# Altium PCB UC-526.PcbDoc (part 2 of 3)
Units mil, origin at the board's own origin, x right, y up, seen from the top; angles counter-clockwise.
Board outline 3149.61 x 3149.61 mil, 2 copper layers (Top Layer, Bottom Layer); 464 components, 208 nets, 2160 pads, 392 vias.
Unrouted connection lines stored in the file: 5.
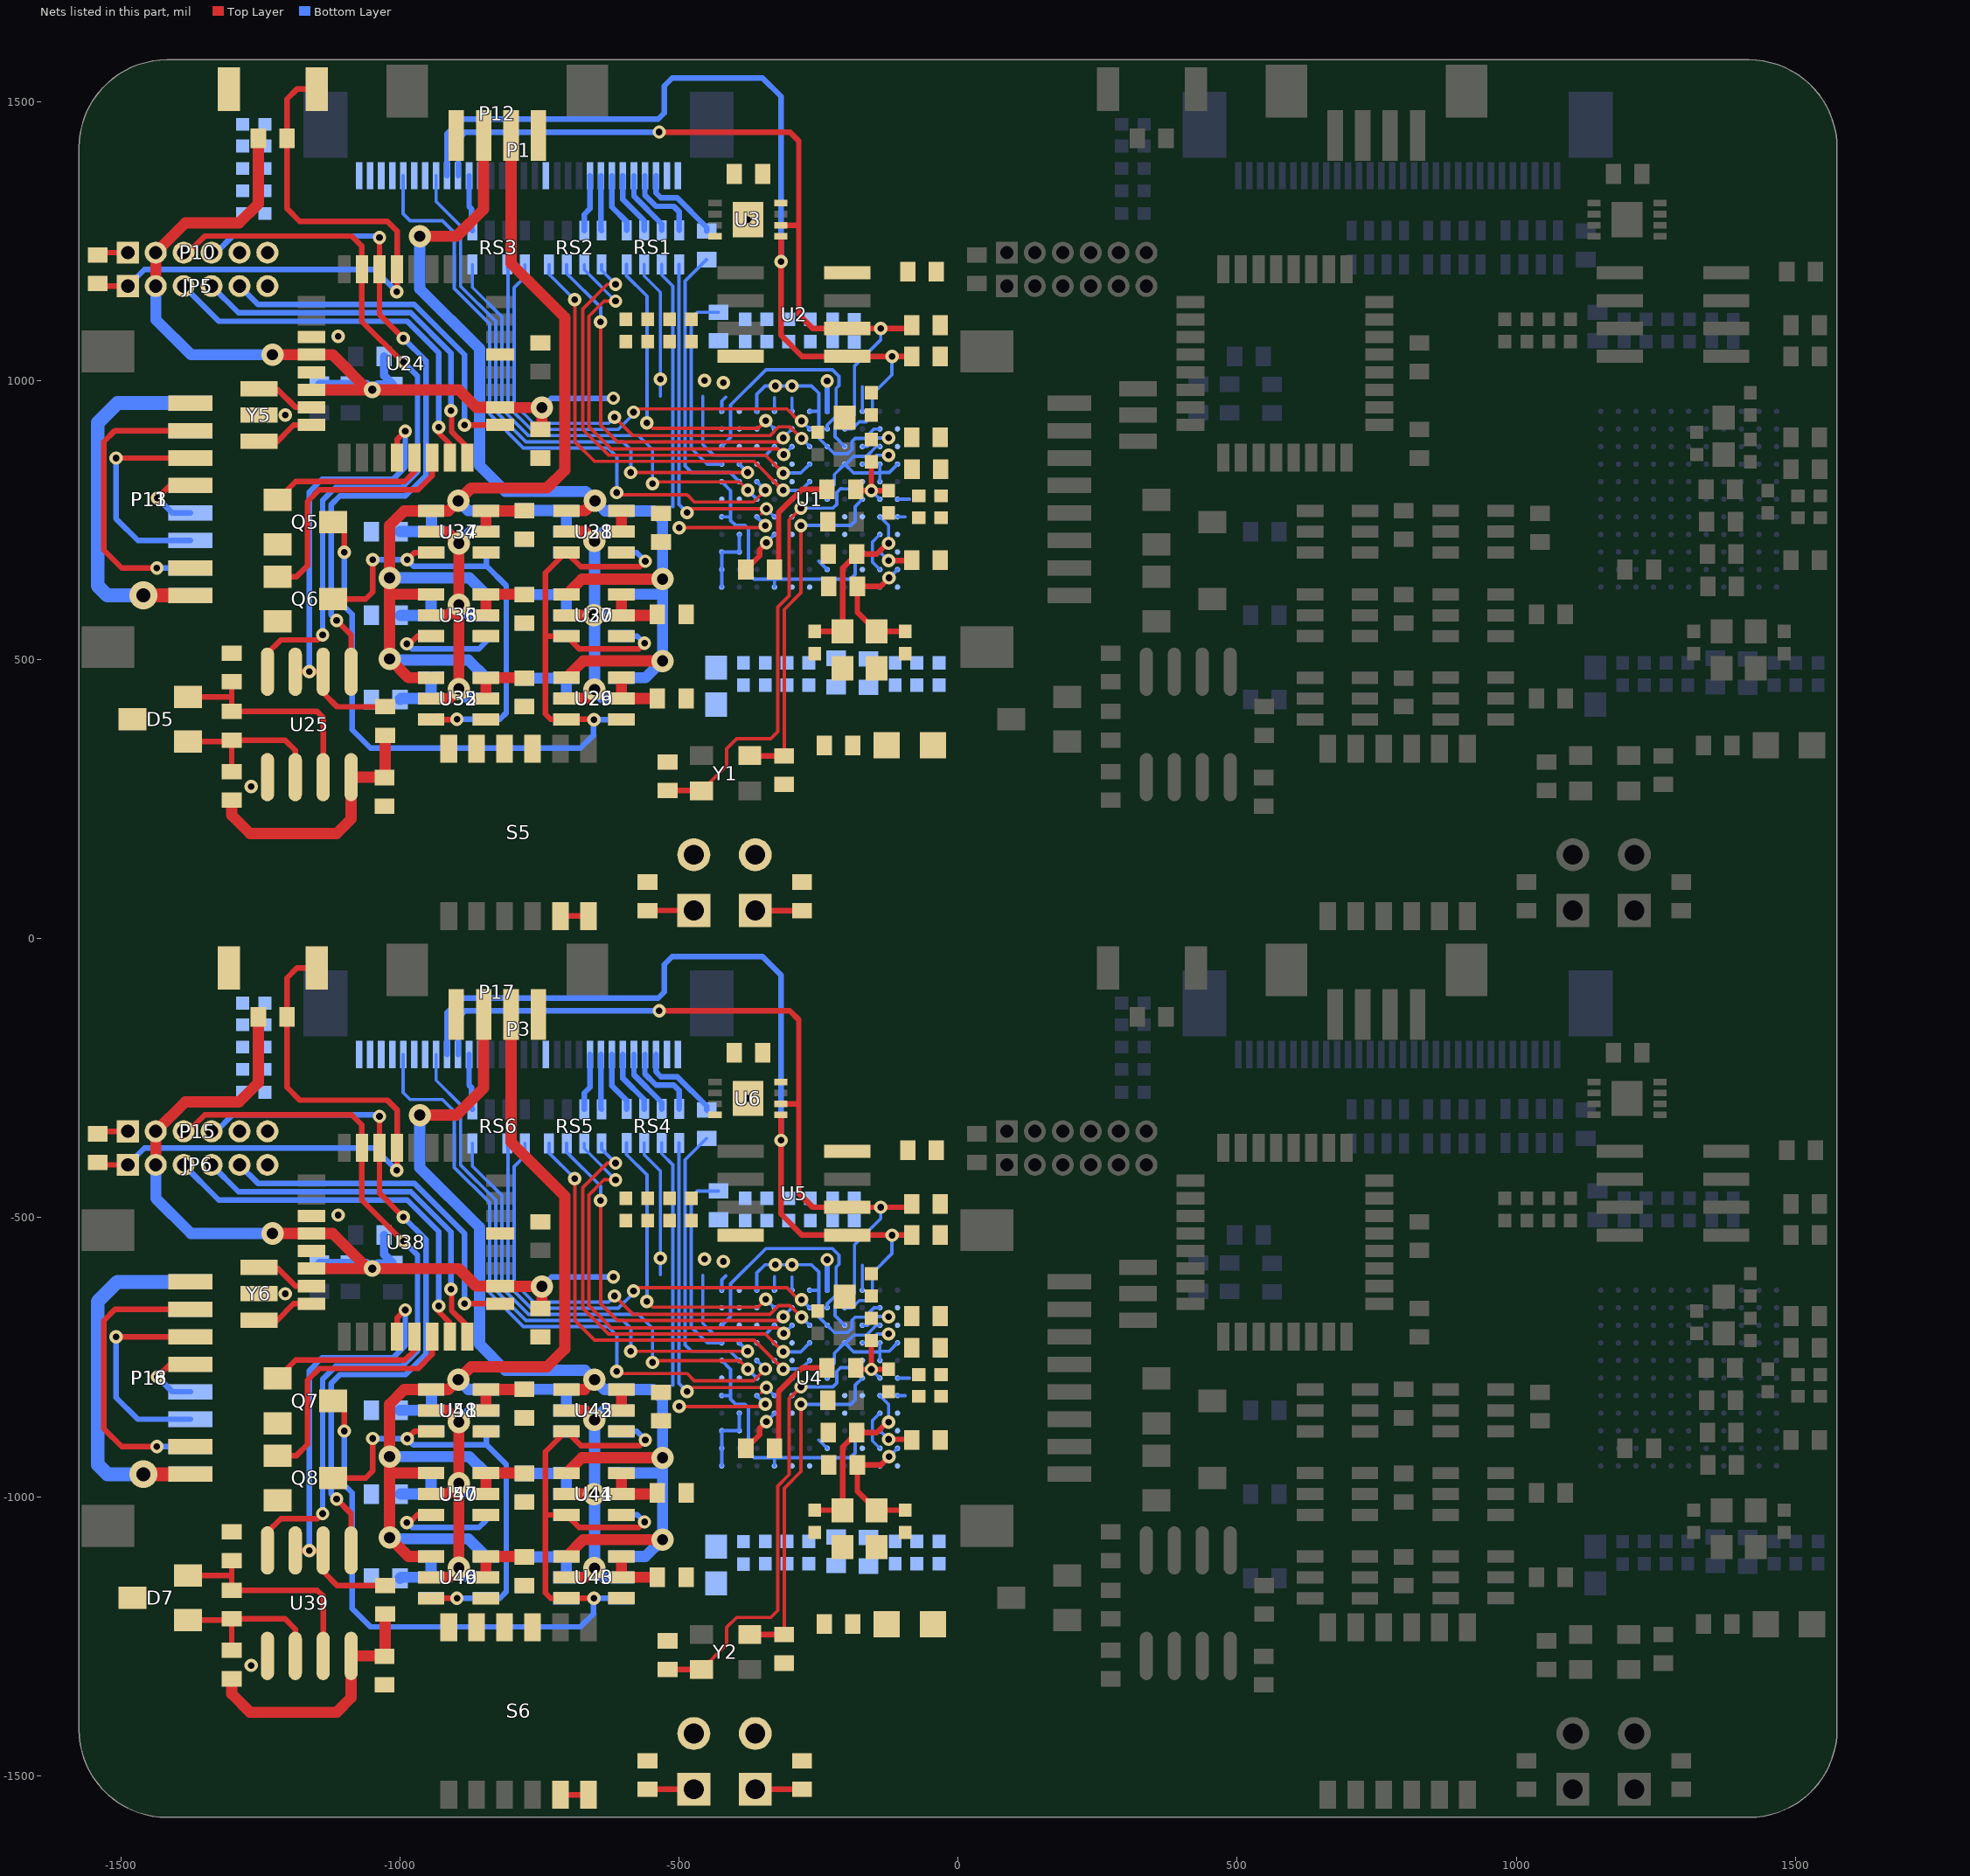
[diagram p2: the nets of this part, all layers, seen from the top]

## Via types
v1: diameter 24, hole 12, Top Layer to Bottom Layer, tented both sides, 320 vias
v2: diameter 40, hole 20, Top Layer to Bottom Layer, tented both sides, 60 vias
v3: diameter 30, hole 15, Top Layer to Bottom Layer, tented both sides, 4 vias
v4: diameter 50, hole 25, Top Layer to Bottom Layer, tented both sides, 4 vias
v5: diameter 24, hole 12, Top Layer to Bottom Layer, 4 vias

## Nets (pads, with @x,y where several pads share a name; then routed paths per layer and width w, separated by ;. In a path a pad name is that pad's centre, name@x,y a point inside that pad or via, vN(x,y) a via of type N, cw(c..) or ccw(c..) an arc to the next point about the centre after c; other vN are vias at no path point) (continued)
D8: R140.1 R163.1 U24.12 U25.2 U25.3 U38.12 U39.2 U39.3 | length 1679.4
  Top Layer w10: U39.3@-1187.4,-1096.43 v1(-1162.4,-1096.43) U39.2@-1137.4,-1096.43 -1137.4,-1134.4 -1112.58,-1159.22 R163.1@-1026.4,-1159.22 ; U25.3@-1187.4,478.38 v1(-1162.4,478.38) U25.2@-1137.4,478.38 -1137.4,440.4 -1112.58,415.58 R140.1@-1026.4,415.58 ; U38.12@-1005.15,-713.05 -1005.15,-680.15 v1(-990.4,-665.4) ; U24.12@-1005.15,861.75 -1005.15,894.66 v1(-990.4,909.4)
  Bottom Layer w10: v1(-1162.4,-1096.43) -1162.4,-774.4 -1139.4,-751.4 -1012.4,-751.4 -990.4,-729.4 v1(-990.4,-665.4) ; v1(-1162.4,478.38) -1162.4,800.4 -1139.4,823.4 -1012.4,823.4 -990.4,845.4 v1(-990.4,909.4)
D8_IO: P1.9 P3.9 RS2.7 RS5.7 | length 205
  Bottom Layer w10: RS5.7@-669.67,-305.9 -669.67,-276.67 -659.45,-266.45 P3.9@-659.45,-207.62 ; RS2.7@-669.67,1268.9 -669.67,1298.13 -659.45,1308.35 P1.9@-659.45,1367.19
D9: Q5.G Q7.G U24.13 U38.13 | length 582.7
  Top Layer w10: Q7.G@-1219.4,-788.4 -1186.4,-755.4 -991.4,-755.4 -973.65,-737.65 U38.13@-973.65,-713.05 ; Q5.G@-1219.4,786.4 -1186.4,819.4 -991.4,819.4 -973.65,837.15 U24.13@-973.65,861.75
D9_IO: P1.8 P3.8 RS2.8 RS5.8 | length 197.5
  Bottom Layer w10: P3.8@-639.76,-207.62 -639.76,-304.8 RS5.8@-638.66,-305.9 ; P1.8@-639.76,1367.19 -639.76,1270 RS2.8@-638.66,1268.9
D10: Q6.G Q8.G U24.14 U38.14 | length 927.6
  Top Layer w10: Q8.G@-1219.4,-926.4 -1185.4,-926.4 -1165.4,-906.4 -1165.4,-791.4 -1144.4,-770.4 -1035.4,-770.4 ; Q6.G@-1219.4,648.4 -1185.4,648.4 -1165.4,668.4 -1165.4,783.4 -1144.4,804.4 -1035.4,804.4 ; -1047.4,-770.4 -1035.4,-770.4 ; -1047.4,804.4 -1035.4,804.4 ; U38.14@-942.16,-713.05 -942.16,-745.16 -967.4,-770.4 -1035.4,-770.4 ; U24.14@-942.16,861.75 -942.16,829.65 -967.4,804.4 -1035.4,804.4
D10_IO: P1.7 P3.7 RS1.5 RS4.5 | length 217.3
  Bottom Layer w10: P3.7@-620.08,-207.62 -620.08,-263.72 -593.9,-289.91 RS4.5@-593.9,-305.4 ; P1.7@-620.08,1367.19 -620.08,1311.08 -593.9,1284.9 RS1.5@-593.9,1269.4
D11_IO: P1.6 P3.6 RS1.6 RS4.6 | length 227
  Bottom Layer w10: P3.6@-600.39,-207.62 -600.39,-250.41 -562.4,-288.4 RS4.6@-562.4,-305.4 ; P1.6@-600.39,1367.19 -600.39,1324.39 -562.4,1286.4 RS1.6@-562.4,1269.4
DTR: C256.1 C260.1 P10.1 P15.1 | length 113.3
  Top Layer w10: C260.1@-1536.99,-345.4 P15.1@-1487.4,-345.4 ; C256.1@-1536.99,1229.4 P10.1@-1487.4,1229.4 ; P15.1@-1481.4,-357.4 P15.1@-1476.4,-352.4 ; P10.1@-1481.4,1217.4 P10.1@-1476.4,1222.4
FRV_IO: P1.4 P3.4 RS1.8 RS4.8 | length 283.4
  Bottom Layer w10: P3.4@-561.02,-207.62 -561.02,-242.57 -541.19,-262.4 -509.4,-262.4 -499.9,-271.91 RS4.8@-499.9,-305.4 ; P1.4@-561.02,1367.19 -561.02,1332.24 -541.19,1312.4 -509.4,1312.4 -499.9,1302.9 RS1.8@-499.9,1269.4
FX3_CTL0: P1.23 P3.23 U1.K8 U4.K8 | length 2017.2
  Top Layer w6: v1(-586.4,-739.4) v1(-376.93,-739.4) ; v1(-586.4,835.4) v1(-376.93,835.4)
  Bottom Layer w6: P3.23@-935.04,-207.62 -935.04,-253.76 -891.4,-297.4 -891.4,-405.4 -828.4,-468.4 -828.4,-630.07 -774.07,-684.4 -600.4,-684.4 -586.4,-698.4 v1(-586.4,-739.4) ; P1.23@-935.04,1367.19 -935.04,1321.04 -891.4,1277.4 -891.4,1169.4 -828.4,1106.4 -828.4,944.73 -774.07,890.4 -600.4,890.4 -586.4,876.4 v1(-586.4,835.4) ; U4.K8@-391.91,-724.42 v1(-376.93,-739.4) ; U1.K8@-391.91,850.38 v1(-376.93,835.4)
FX3_CTL1: R2.2 R13.2 U1.K7 U4.K7 | length 988.9
  Bottom Layer w6: R13.2@-450.4,-357.99 -488.9,-396.49 -488.9,-727.91 -477.4,-739.4 -408.42,-739.4 U4.K7@-391.91,-755.91 ; R2.2@-450.4,1216.81 -488.9,1178.32 -488.9,846.9 -477.4,835.4 -408.42,835.4 U1.K7@-391.91,818.89
FX3_CTL2: P1.26 P3.26 U1.J7 U4.J7 | length 2304.9
  Top Layer w6: v1(-611.4,-775.4) -607.4,-779.4 -485.4,-779.4 -472.4,-792.4 -366.45,-792.4 v1(-345.19,-771.14) ; v1(-611.4,799.4) -607.4,795.4 -485.4,795.4 -472.4,782.4 -366.45,782.4 v1(-345.19,803.66)
  Bottom Layer w6: P3.26@-994.09,-207.62 -994.09,-275.71 -981.59,-288.21 -923.59,-288.21 -902.4,-309.4 -902.4,-409.96 -839.4,-472.96 -839.4,-634.63 -778.63,-695.4 -627.4,-695.4 -611.4,-711.4 v1(-611.4,-775.4) ; P1.26@-994.09,1367.19 -994.09,1299.09 -981.59,1286.59 -923.59,1286.59 -902.4,1265.4 -902.4,1164.85 -839.4,1101.85 -839.4,940.18 -778.63,879.4 -627.4,879.4 -611.4,863.4 v1(-611.4,799.4) ; U4.J7@-360.42,-755.91 v1(-345.19,-771.14) ; U1.J7@-360.42,818.89 v1(-345.19,803.66)
FX3_CTL3: U1.H7 U4.H7
FX3_CTL4_SW: U1.G7 U4.G7
FX3_CTL5: U1.G6 U4.G6
FX3_CTL6: U1.K6 U4.K6
FX3_CTL7: U1.H8 U4.H8
FX3_CTL8: U1.G5 U4.G5 V1.2 V2.2
FX3_CTL11: RS1.2 RS4.2 U1.J5 U4.J5 | length 1239.4
  Top Layer w6: v1(-499.4,-838.4) -349.4,-838.4 v1(-345.4,-834.4) ; v1(-499.4,736.4) -349.4,736.4 v1(-345.4,740.4)
  Bottom Layer w6: RS4.2@-530.91,-366.4 -530.91,-385.39 -510.9,-405.4 -510.9,-800.4 ; RS1.2@-530.91,1208.4 -530.91,1189.41 -510.9,1169.4 -510.9,774.4 ; U4.J5@-360.42,-818.89 -360.42,-819.38 v1(-345.4,-834.4) ; U1.J5@-360.42,755.91 -360.42,755.42 v1(-345.4,740.4)
FX3_CTL12: RS1.1 RS4.1 U1.H5 U4.H5 | length 1258.2
  Top Layer w6: v1(-485.4,-811.4) -478.4,-804.4 v1(-343.42,-804.4) -352.42,-813.4 ; v1(-485.4,763.4) -478.4,770.4 v1(-343.42,770.4) -352.42,761.4
  Bottom Layer w6: RS4.1@-499.9,-366.4 -499.9,-796.91 v1(-485.4,-811.4) ; RS1.1@-499.9,1208.4 -499.9,777.9 v1(-485.4,763.4) ; v1(-343.42,-804.4) U4.H5@-328.93,-818.89 ; v1(-343.42,770.4) U1.H5@-328.93,755.91
FX3_CTL15: R5.2 R16.2 U1.L8 U4.L8 | length 704.4
  Bottom Layer w6: R16.2@-429.4,-452.28 -467.28,-452.28 -477.9,-462.9 -477.9,-695.93 -449.4,-724.42 U4.L8@-423.4,-724.42 ; R5.2@-429.4,1122.53 -467.28,1122.53 -477.9,1111.91 -477.9,878.88 -449.4,850.38 U1.L8@-423.4,850.38
FX3_DQ0: RS3.2 RS6.2 U1.F10 U4.F10 | length 1693.6
  Top Layer w6: v1(-581.4,-631.4) -575.4,-625.4 -306.77,-625.4 -285.18,-646.99 v1(-280.4,-646.99) v1@-280.72,-646.67 ; v1(-581.4,943.4) -575.4,949.4 -306.77,949.4 -285.18,927.81 v1(-280.4,927.81) v1@-280.72,928.13
  Bottom Layer w6: RS6.2@-807.18,-374.21 RS6.2@-807.18,-366.9 -806.4,-367.68 -806.4,-620.96 -764.96,-662.4 -608.76,-662.4 v1@-582.61,-636.25 ; RS3.2@-807.18,1200.59 RS3.2@-807.18,1207.9 -806.4,1207.12 -806.4,953.85 -764.96,912.4 -608.76,912.4 v1@-582.61,938.56 ; v1(-280.4,-646.99) U4.F10@-265.95,-661.44 ; v1(-280.4,927.81) U1.F10@-265.95,913.36
FX3_DQ1: RS3.1 RS6.1 U1.F9 U4.F9 | length 1687.9
  Top Layer w6: v1(-615.4,-640.4) -582.4,-673.4 -337.2,-673.4 -321.47,-657.67 -301.21,-657.67 v1(-280.4,-678.48) v1@-280.4,-675.28 ; v1(-615.4,934.4) -582.4,901.4 -337.2,901.4 -321.47,917.13 -301.21,917.13 v1(-280.4,896.32) v1@-280.4,899.53
  Bottom Layer w6: RS6.1@-776.17,-366.9 -776.17,-389.17 -795.4,-408.4 -795.4,-616.4 -760.4,-651.4 -626.4,-651.4 v1(-615.4,-640.4) ; RS3.1@-776.17,1207.9 -776.17,1185.63 -795.4,1166.4 -795.4,958.4 -760.4,923.4 -626.4,923.4 v1(-615.4,934.4) ; v1(-280.4,-678.48) U4.F9@-265.95,-692.93 ; v1(-280.4,896.32) U1.F9@-265.95,881.87
FX3_DQ2: RS2.4 RS5.4 U1.F7 U4.F7 | length 1612.4
  Top Layer w6: v1@-686.4,-429.9 -686.4,-684.4 -651.4,-719.4 -365.4,-719.4 v1(-313.4,-771.4) ; v1@-686.4,1144.9 -686.4,890.4 -651.4,855.4 -365.4,855.4 v1(-313.4,803.4)
  Bottom Layer w6: RS5.4@-732.66,-373.72 RS5.4@-732.66,-366.9 -732.66,-384.14 v1(-686.9,-429.9) ; RS2.4@-732.66,1201.08 RS2.4@-732.66,1207.9 -732.66,1190.66 v1(-686.9,1144.9) ; v1(-313.4,-771.4) -281.44,-771.4 U4.F7@-265.95,-755.91 ; v1(-313.4,803.4) -281.44,803.4 U1.F7@-265.95,818.89
FX3_DQ3: RS2.3 RS5.3 U1.G10 U4.G10 | length 1396.5
  Top Layer w6: v1(-640.4,-469.4) -640.4,-654.4 -610.4,-684.4 -319.92,-684.4 v1(-313.19,-677.67) ; v1(-640.4,1105.4) -640.4,920.4 -610.4,890.4 -319.92,890.4 v1(-313.19,897.13)
  Bottom Layer w6: RS5.3@-701.17,-373.72 RS5.3@-701.17,-366.9 -701.17,-382.63 -640.4,-443.4 v1(-640.4,-469.4) ; RS2.3@-701.17,1201.08 RS2.3@-701.17,1207.9 -701.17,1192.17 -640.4,1131.4 v1(-640.4,1105.4) ; v1(-313.19,-677.67) v1@-313.19,-678.97 ; v1(-313.19,897.13) v1@-313.19,895.83 ; U4.G10@-297.44,-661.44 -312.54,-676.54 -312.54,-678.32 v1@-313.19,-678.97 ; U1.G10@-297.44,913.36 -312.54,898.27 -312.54,896.48 v1@-313.19,895.83 ; v1@-313.19,-678.97 -313.19,-682.19 -316.4,-682.19 v1@-313.19,-678.97 ; v1@-313.19,895.83 -313.19,892.62 -316.4,892.62 v1@-313.19,895.83
FX3_DQ4: RS2.2 RS5.2 U1.G9 U4.G9 | length 1487.3
  Top Layer w6: v1(-613.53,-432.27) -634.27,-432.27 -661.4,-459.4 -661.4,-657.4 -621.4,-697.4 -322.4,-697.4 v1(-312.4,-707.4) ; v1(-613.53,1142.53) -634.27,1142.53 -661.4,1115.4 -661.4,917.4 -621.4,877.4 -322.4,877.4 v1(-312.4,867.4)
  Bottom Layer w6: RS5.2@-669.67,-366.9 -669.67,-376.13 v1@-608.4,-437.4 ; RS2.2@-669.67,1207.9 -669.67,1198.67 v1@-608.4,1137.4 ; v1@-311.9,-707.9 -297.44,-693.44 U4.G9@-297.44,-692.93 ; v1@-311.9,866.9 -297.44,881.36 U1.G9@-297.44,881.87
FX3_DQ5: RS2.1 RS5.1 U1.F8 U4.F8 | length 1587.7
  Top Layer w6: v1(-613.53,-402.27) -628.27,-402.27 -672.4,-446.4 -672.4,-662.4 -626.4,-708.4 -442.4,-708.4 ; v1(-613.53,1172.53) -628.27,1172.53 -672.4,1128.4 -672.4,912.4 -626.4,866.4 -442.4,866.4 ; -450.4,-708.4 -442.4,-708.4 ; -450.4,866.4 -442.4,866.4 ; v1(-313.4,-740.4) -345.4,-708.4 -442.4,-708.4 ; v1(-313.4,834.4) -345.4,866.4 -442.4,866.4
  Bottom Layer w6: RS5.1@-638.66,-366.9 -638.66,-377.14 v1(-613.53,-402.27) ; RS2.1@-638.66,1207.9 -638.66,1197.66 v1(-613.53,1172.53) ; v1(-313.4,-740.4) -281.93,-740.4 U4.F8@-265.95,-724.42 U4.F8@-265.95,-725.95 ; v1(-313.4,834.4) -281.93,834.4 U1.F8@-265.95,850.38 U1.F8@-265.95,848.85
FX3_DQ6: RS1.4 RS4.4 U1.H10 U4.H10 | length 1104.3
  Top Layer w6: v1(-557.4,-650.4) -547.4,-660.4 -358.4,-660.4 v1(-344.4,-646.4) ; v1(-557.4,924.4) -547.4,914.4 -358.4,914.4 v1(-344.4,928.4)
  Bottom Layer w6: RS4.4@-593.9,-373.22 RS4.4@-593.9,-366.4 -593.9,-386.91 -557.4,-423.4 v1(-557.4,-650.4) ; RS1.4@-593.9,1201.58 RS1.4@-593.9,1208.4 -593.9,1187.9 -557.4,1151.4 v1(-557.4,924.4) ; v1(-344.4,-646.4) -343.97,-646.4 U4.H10@-328.93,-661.44 U4.H10@-328.93,-659.87 ; v1(-344.4,928.4) -343.97,928.4 U1.H10@-328.93,913.36 U1.H10@-328.93,914.93
FX3_DQ7: RS1.3 RS4.3 U1.H9 U4.H9 | length 967.2
  Bottom Layer w6: RS4.3@-562.4,-373.22 RS4.3@-562.4,-366.4 -562.4,-387.4 -533.4,-416.4 -533.4,-602.4 ; RS1.3@-562.4,1201.58 RS1.3@-562.4,1208.4 -562.4,1187.4 -533.4,1158.4 -533.4,972.4 ; -457.4,-603.4 -457.4,-689.4 -438.4,-708.4 -344.4,-708.4 U4.H9@-328.93,-692.93 ; -457.4,971.4 -457.4,885.4 -438.4,866.4 -344.4,866.4 U1.H9@-328.93,881.87
  other v1: -454.4,-574.4 -533.4,-572.4 -454.4,1000.4 -533.4,1002.4
FX3_DQ8: U1.J10 U4.J10
FX3_DQ9: U1.J9 U4.J9
FX3_DQ10: U1.K11 U4.K11
FX3_DQ11: U1.L10 U4.L10
FX3_DQ12: U1.K10 U4.K10
FX3_DQ13: U1.K9 U4.K9
FX3_DQ14: U1.J8 U4.J8
FX3_DQ15: U1.G8 U4.G8
FX3_I2S_SCL: P1.21 P3.21 R8.1 R19.1 U1.D9 U2.6 U3.6 U4.D9 U5.6 U6.6 | length 3010
  Top Layer w10: v1(-535.4,-129.4) -301.4,-129.4 -285.4,-145.4 -285.4,-456.4 -260.4,-481.4 U5.6@-198.51,-481.4 v1(-138.4,-481.4) -88.99,-481.4 R19.1@-82.99,-475.4 ; v1(-535.4,1445.4) -301.4,1445.4 -285.4,1429.4 -285.4,1118.4 -260.4,1093.4 U2.6@-198.51,1093.4 v1(-138.4,1093.4) -88.99,1093.4 R8.1@-82.99,1099.4 ; U6.6@-317.35,-296.24 -286.24,-296.24 ; U3.6@-317.35,1278.56 -286.24,1278.56
  Bottom Layer w6: U4.D9@-202.97,-692.93 -220.4,-675.5 -220.4,-657.4 -205.88,-642.88 -192.88,-642.88 -185.4,-635.4 -185.4,-548.4 -138.4,-501.4 v1(-138.4,-481.4) ; U1.D9@-202.97,881.87 -220.4,899.3 -220.4,917.4 -205.88,931.93 -192.88,931.93 -185.4,939.4 -185.4,1026.4 -138.4,1073.4 v1(-138.4,1093.4)
  Bottom Layer w10: P3.21@-895.67,-207.62 -895.67,-142.67 -882.4,-129.4 v1(-535.4,-129.4) ; P1.21@-895.67,1367.19 -895.67,1432.13 -882.4,1445.4 v1(-535.4,1445.4)
FX3_I2S_SDA: P1.22 P3.22 R7.1 R18.1 U1.D10 U2.5 U3.5 U4.D10 U5.5 U6.5 | length 3295.2
  Top Layer w10: U6.5@-317.35,-315.93 v1(-317.35,-361.4) -317.35,-493.4 -279.35,-531.4 U5.5@-198.51,-531.4 -131.4,-531.4 ; U3.5@-317.35,1258.87 v1(-317.35,1213.4) -317.35,1081.4 -279.35,1043.4 U2.5@-198.51,1043.4 -131.4,1043.4 ; v1(-118.4,-531.4) R18.1@-82.99,-531.4 ; v1(-118.4,1043.4) R7.1@-82.99,1043.4
  Bottom Layer w6: U4.D10@-202.97,-661.44 -189.76,-661.44 -176.84,-648.52 -164.52,-648.52 -153.4,-637.4 -153.4,-599.4 -118.4,-564.4 v1(-118.4,-531.4) ; U1.D10@-202.97,913.36 -189.76,913.36 -176.84,926.29 -164.52,926.29 -153.4,937.4 -153.4,975.4 -118.4,1010.4 v1(-118.4,1043.4)
  Bottom Layer w10: P3.22@-915.35,-207.62 -915.35,-132.35 -889.4,-106.4 -537.4,-106.4 -526.4,-95.4 -526.4,-46.4 -512.4,-32.4 -350.4,-32.4 -317.35,-65.46 v1(-317.35,-361.4) ; P1.22@-915.35,1367.19 -915.35,1442.45 -889.4,1468.4 -537.4,1468.4 -526.4,1479.4 -526.4,1528.4 -512.4,1542.4 -350.4,1542.4 -317.35,1509.35 v1(-317.35,1213.4)
FX3_PCLK: RS3.4 RS6.4 U1.J6 U4.J6 | length 1685.4
  Top Layer w6: v1(-547.4,-759.4) -544.4,-756.4 -391.42,-756.4 v1(-376.4,-771.42) ; v1(-547.4,815.4) -544.4,818.4 -391.42,818.4 v1(-376.4,803.38)
  Bottom Layer w6: RS6.4@-870.17,-366.9 -870.17,-407.63 -817.4,-460.4 -817.4,-625.51 -769.51,-673.4 -572.4,-673.4 -547.4,-698.4 v1(-547.4,-759.4) ; RS3.4@-870.17,1207.9 -870.17,1167.17 -817.4,1114.4 -817.4,949.29 -769.51,901.4 -572.4,901.4 -547.4,876.4 v1(-547.4,815.4) ; v1(-376.4,-771.42) U4.J6@-360.42,-787.4 ; v1(-376.4,803.38) U1.J6@-360.42,787.4
FX3_RESET: C4.2 C44.2 R6.2 R17.2 U1.C5 U4.C5
FX3_SPI-MISO_UART-TX: U1.C2 U4.C2
FX3_SPI-MOSI_UART-RX: U1.D5 U4.D5
FX3_SPI-SCK_UART-RTS: U1.D4 U4.D4
FX3_SPI-SSN_UART-CTS: U1.C1 U4.C1
GND: C1.1 C2.1 C4.1 C5.2 C6.2 C7.1 C8.2 C9.2 C10.2 C11.2 C12.2 C13.1 C14.2 C15.2 C16.2 C17.2 C18.2 C19.2 C20.2 C21.2 C22.2 C23.2 C24.2 C26.1 C27.2 C29.2 C30.2 C31.2 C32.2 C33.2 C34.2 C35.2 C36.2 C37.2 C38.1 C39.1 C40.2 C41.1 C42.1 C44.1 C45.2 C46.2 C47.1 C48.2 C49.2 C50.2 C51.2 C52.2 C53.1 C54.2 C55.2 C56.2 C57.2 C58.2 C59.2 C60.2 C61.2 C62.2 C64.2 C65.2 C66.1 C68.2 C69.2 C70.2 C71.2 C72.2 C73.2 C74.2 C75.2 C76.2 C77.2 C78.1 C79.1 C80.2 C257.1 C258.2 C259.1 C261.1 C262.2 C263.1 D5.3 D7.3 JP5.6 JP6.6 K5.1 K6.1 P1.1 P1.13 P1.24 P1.25 P3.1 P3.13 P3.24 P3.25 P9.2 P10.5 P10.6 P11.1 P11.4 P11.7 P12.4 P13.1 P13.4 P13.7 P14.2 P15.5 P15.6 P16.1 P16.4 P16.7 P17.4 P18.1 P18.4 P18.7 Q5.S Q6.S Q7.S Q8.S R9.2 R10.2 R11.2 R20.2 R21.2 R22.2 R135.1 R138.1 R141.2 R142.2 R143.2 R144.2 R145.2 R146.2 R147.2 R148.2 R149.2 R150.2 R151.2 R152.2 R158.1 R161.1 R164.2 R165.2 R166.2 R167.2 R168.2 R169.2 R170.2 R171.2 R172.2 R173.2 R174.2 R175.2 S5.9 S5.10 S5.11 S5.12 S6.9 S6.10 S6.11 S6.12 U1.A1 U1.A8 U1.B2 U1.B4 U1.B7 U1.B8 U1.B9 U1.D8 U1.E2 U1.E6 U1.G1 U1.G11 U1.K3 U1.K4 U1.L1 U1.L2 U1.L3 U1.L6 U1.L11 U2.4 U3.4 U4.A1 U4.A8 U4.B2 U4.B4 U4.B7 U4.B8 U4.B9 U4.D8 U4.E2 U4.E6 U4.G1 U4.G11 U4.K3 U4.K4 U4.L1 U4.L2 U4.L3 U4.L6 U4.L11 U5.4 U6.4 U24.3 U24.5 U24.21 U25.5 U26.4 U27.4 U28.4 U29.4 U30.4 U31.4 U32.4 U33.4 U34.4 U35.4 U36.4 U37.4 U38.3 U38.5 U38.21 U39.5 U40.4 U41.4 U42.4 U43.4 U44.4 U45.4 U46.4 U47.4 U48.4 U49.4 U50.4 U51.4 Y5.2 Y6.2 | length 1402.6
  Top Layer w10: v1(-1434.4,-785.4) -1411.8,-762.8 P16.4@-1375.43,-762.8 ; v1(-1434.4,789.4) -1411.8,812.01 P11.4@-1375.43,812.01
  Bottom Layer w6: U4.L1@-423.4,-944.85 U4.L2@-423.4,-913.36 U4.L3@-423.4,-881.87 U4.K3@-391.91,-881.87 U4.K4@-391.91,-850.38 ; U4.L11@-423.4,-629.95 -423.4,-611.4 -416.4,-604.4 ; U1.L1@-423.4,629.95 U1.L2@-423.4,661.44 U1.L3@-423.4,692.93 U1.K3@-391.91,692.93 U1.K4@-391.91,724.42 ; U1.L11@-423.4,944.85 -423.4,963.4 -416.4,970.4 ; U4.G11@-297.44,-629.95 -297.44,-606.44 ; U1.G11@-297.44,944.85 -297.44,968.36 ; -249.4,-898.42 U4.E2@-234.46,-913.36 ; -249.4,676.38 U1.E2@-234.46,661.44 ; U4.E6@-234.46,-787.4 -234.46,-774.19 -221.54,-761.27 -221.54,-742.99 U4.D8@-202.97,-724.42 ; U1.E6@-234.46,787.4 -234.46,800.61 -221.54,813.54 -221.54,831.82 U1.D8@-202.97,850.38 ; U4.B2@-139.99,-913.36 -153.4,-899.95 -153.4,-863.79 U4.B4@-139.99,-850.38 ; U4.B7@-139.99,-755.91 -139.99,-740.4 ; U4.B8@-139.99,-724.42 -139.99,-740.4 ; U4.B9@-139.99,-692.93 -146.38,-692.93 -163.85,-710.4 -186.61,-710.4 -200.63,-724.42 U4.D8@-202.97,-724.42 ; U1.B2@-139.99,661.44 -153.4,674.85 -153.4,711.01 U1.B4@-139.99,724.42 ; U1.B7@-139.99,818.89 -139.99,834.4 ; U1.B8@-139.99,850.38 -139.99,834.4 ; U1.B9@-139.99,881.87 -146.38,881.87 -163.85,864.4 -186.61,864.4 -200.63,850.38 U1.D8@-202.97,850.38 ; -138.99,-739.4 -123.48,-739.4 U4.A8@-108.5,-724.42 ; -138.99,835.4 -123.48,835.4 U1.A8@-108.5,850.38 ; U4.D8@-202.97,-724.42 -186.99,-740.4 -139.99,-740.4 ; U1.D8@-202.97,850.38 -186.99,834.4 -139.99,834.4
  Bottom Layer w10: v1(-1434.4,-785.4) -1407.8,-812.01 P18.4@-1375.43,-812.01 ; v1(-1434.4,789.4) -1407.8,762.8 P13.4@-1375.43,762.8
  other v1: -1266.4,-1302.4 -1205.4,-636.4 -297.4,-584.4 -420.4,-578.4 -1110.4,-495.4 -1266.4,272.4 -1205.4,938.4 -297.4,990.4 -420.4,996.4 -1110.4,1079.4
  other v5: -376.4,-286.4 -376.4,1288.4
LIV_IO: P1.5 P3.5 RS1.7 RS4.7 | length 236.8
  Bottom Layer w10: P3.5@-580.71,-207.62 -580.71,-244.09 -530.91,-293.9 RS4.7@-530.91,-305.4 ; P1.5@-580.71,1367.19 -580.71,1330.71 -530.91,1280.91 RS1.7@-530.91,1269.4
MISO: JP5.4 JP6.4 U24.16 U38.16 | length 1357
  Top Layer w10: v1(-908.4,-628.4) -907.4,-629.4 -907.4,-666.4 -895.75,-678.05 -895.52,-678.05 -879.17,-694.41 U38.16@-879.17,-713.06 ; v1(-908.4,946.4) -907.4,945.4 -907.4,908.4 -895.75,896.75 -895.52,896.75 -879.17,880.39 U24.16@-879.17,861.75
  Bottom Layer w10: JP6.4@-1337.4,-405.4 -1289.4,-453.4 -980.61,-453.4 -908.4,-525.61 v1(-908.4,-628.4) ; JP5.4@-1337.4,1169.4 -1289.4,1121.4 -980.61,1121.4 -908.4,1049.19 v1(-908.4,946.4)
MOSI: JP5.3 JP6.3 U24.15 U38.15 | length 1405.7
  Top Layer w10: v1(-930.4,-658.4) -930.4,-668.4 -910.66,-688.14 U38.15@-910.66,-713.05 ; v1(-930.4,916.4) -930.4,906.4 -910.66,886.66 U24.15@-910.66,861.75
  Bottom Layer w10: JP6.3@-1387.4,-405.4 -1324.4,-468.4 -986.83,-468.4 -930.4,-524.83 v1(-930.4,-658.4) ; JP5.3@-1387.4,1169.4 -1324.4,1106.4 -986.83,1106.4 -930.4,1049.98 v1(-930.4,916.4)
NetC5_1: C5.1 C6.1 L1.1 U1.B6 | length 135.3
  Top Layer w10: L1.1@-183.4,805.4 -180.81,802.81 v1(-155.4,802.81) ; v1@-155.4,800.81 v1@-153.4,800.81 ; C6.1@-155.4,854.4 v1(-155.4,802.81) ; C5.1@-124.58,802.81 v1(-155.4,802.81)
  Bottom Layer w6: v1(-155.4,802.81) U1.B6@-139.99,787.4
NetC45_1: C45.1 C46.1 L5.1 U4.B6 | length 135.3
  Top Layer w10: L5.1@-183.4,-769.4 -180.81,-771.99 v1(-155.4,-771.99) ; v1@-155.4,-773.99 v1@-153.4,-773.99 ; C46.1@-155.4,-720.4 v1(-155.4,-771.99) ; C45.1@-124.58,-771.99 v1(-155.4,-771.99)
  Bottom Layer w6: v1(-155.4,-771.99) U4.B6@-139.99,-787.4
NetC85_1: 
NetC125_1: 
NetP2_1: P2.1 R3.1 | length 84.1
  Top Layer w10: P2.1@-363.4,50.4 -363.22,50.22 R3.1@-279.4,50.22
NetP2_2: P2.2 U1.G4
NetP4_1: P4.1 R14.1 | length 84.1
  Top Layer w10: P4.1@-363.4,-1524.4 -363.22,-1524.58 R14.1@-279.4,-1524.58
NetP4_2: P4.2 U4.G4
NetP6_1: 
NetP6_2: 
NetP8_1: 
NetP8_2: 
NetQ5_D: Q5.D U26.3 U27.3 U28.3 U29.3 U30.3 U31.3 | length 1748.8
  Top Layer w10: Q5.D@-1119.4,746.4 -1117.4,746.4 -1099.4,728.4 v1(-1099.4,692.4) ; -738,542 U27.3@-701.33,542 -678.73,519.4 -571.75,519.4 v1(-561.77,529.38) ; U28.3@-701.33,692 -675.73,666.4 -570.4,666.4 ; U28.3@-698.4,696.4 -739.4,655.4 -739.4,402.4 -730,393 U26.3@-701.33,393 v1@-652.8,393
  Bottom Layer w10: v1(-1099.4,692.4) -1099.4,595.4 -1085.4,581.4 -1085.4,374.4 -1052.4,341.4 -676.4,341.4 -653.31,364.5 v1@-653.31,392.6 ; v1(-652.4,392.6) U29.3@-603.47,392.6 ; U30.3@-603.47,542.21 -574.6,542.21 v1(-561.77,529.38) ; U31.3@-603.47,691.81 -575.81,691.81 v1(-560.4,676.4)
NetQ6_D: Q6.D U32.3 U33.3 U34.3 U35.3 U36.3 U37.3 | length 1067.2
  Top Layer w10: Q6.D@-1119.4,608.4 -1061.4,608.4 -1048.65,621.15 v1(-1048.65,679.15) ; v1(-986.9,678.9) -973.99,691.81 U34.3@-944.33,691.81 ; v1@-981.4,529.4 -968.6,542.21 U33.3@-944.33,542.21 ; U32.3@-951.2,392.6 U32.3@-944.33,392.6 -898.6,392.6 v1@-898.4,392.4
  Bottom Layer w10: v1@-1048.65,678.9 v1(-986.9,678.9) -975.4,667.4 -844.4,667.4 ; v1(-987.4,528.4) -978.4,519.4 -933.4,519.4 ; -958.4,519.4 -933.4,519.4 ; v1(-897.8,393) U35.3@-845.91,393 -820.8,393 -809.4,404.4 -809.4,632.4 -844.4,667.4 ; U36.3@-845.91,542 -845.91,531.9 -858.4,519.4 -933.4,519.4 ; U37.3@-844.91,692 -844.91,667.91 -844.4,667.4
NetQ7_D: Q7.D U40.3 U41.3 U42.3 U43.3 U44.3 U45.3 | length 1748.8
  Top Layer w10: Q7.D@-1119.4,-828.4 -1117.4,-828.4 -1099.4,-846.4 v1(-1099.4,-882.4) ; -738,-1032.8 U41.3@-701.33,-1032.8 -678.73,-1055.4 -571.75,-1055.4 v1(-561.77,-1045.42) ; U42.3@-701.33,-882.8 -675.73,-908.4 -570.4,-908.4 ; U42.3@-698.4,-878.4 -739.4,-919.4 -739.4,-1172.4 -730,-1181.8 U40.3@-701.33,-1181.8 v1@-652.8,-1181.8
  Bottom Layer w10: v1(-1099.4,-882.4) -1099.4,-979.4 -1085.4,-993.4 -1085.4,-1200.4 -1052.4,-1233.4 -676.4,-1233.4 -653.31,-1210.31 v1@-653.31,-1182.2 ; v1(-652.4,-1182.2) U43.3@-603.47,-1182.2 ; U44.3@-603.47,-1032.6 -574.6,-1032.6 v1(-561.77,-1045.42) ; U45.3@-603.47,-882.99 -575.81,-882.99 v1(-560.4,-898.4)
NetQ8_D: Q8.D U46.3 U47.3 U48.3 U49.3 U50.3 U51.3 | length 1067.2
  Top Layer w10: Q8.D@-1119.4,-966.4 -1061.4,-966.4 -1048.65,-953.65 v1(-1048.65,-895.65) ; v1(-986.9,-895.9) -973.99,-882.99 U48.3@-944.33,-882.99 ; v1@-981.4,-1045.4 -968.6,-1032.6 U47.3@-944.33,-1032.6 ; U46.3@-951.2,-1182.2 U46.3@-944.33,-1182.2 -898.6,-1182.2 v1@-898.4,-1182.4
  Bottom Layer w10: v1@-1048.65,-895.9 v1(-986.9,-895.9) -975.4,-907.4 -844.4,-907.4 ; v1(-987.4,-1046.4) -978.4,-1055.4 -933.4,-1055.4 ; -958.4,-1055.4 -933.4,-1055.4 ; v1(-897.8,-1181.8) U49.3@-845.91,-1181.8 -820.8,-1181.8 -809.4,-1170.4 -809.4,-942.4 -844.4,-907.4 ; U50.3@-845.91,-1032.8 -845.91,-1042.91 -858.4,-1055.4 -933.4,-1055.4 ; U51.3@-844.91,-882.8 -844.91,-906.9 -844.4,-907.4
NetQ13_D: 
NetQ14_D: 
NetQ15_D: 
NetQ16_D: 
NetR1_1: R1.1 V1.1
NetR4_1: R4.1 U1.H4 | length 84.2
  Top Layer w10: R4.1@-380.11,661.44 -355.58,685.97 -355.58,697.22 v1(-343.4,709.4)
  Bottom Layer w6: v1(-343.4,709.4) -328.93,723.87 U1.H4@-328.93,724.42
NetR10_1: R10.1 U1.C8 | length 53.7
  Bottom Layer w6: U1.C8@-171.48,850.38 -161.42,850.38 -145.4,866.4 v1(-124.4,866.4)
NetR11_1: R11.1 U1.B3 | length 63.6
  Top Layer w10: v1(-124.46,677.4) -84.21,677.4 R11.1@-83.21,678.4
  Bottom Layer w6: U1.B3@-139.99,692.93 v1(-124.46,677.4)
NetR12_1: R12.1 V2.1
NetR15_1: R15.1 U4.H4 | length 84.2
  Top Layer w10: R15.1@-380.11,-913.36 -355.58,-888.83 -355.58,-877.58 v1(-343.4,-865.4)
  Bottom Layer w6: v1(-343.4,-865.4) -328.93,-850.93 U4.H4@-328.93,-850.38
NetR21_1: R21.1 U4.C8 | length 53.7
  Bottom Layer w6: U4.C8@-171.48,-724.42 -161.42,-724.42 -145.4,-708.4 v1(-124.4,-708.4)
NetR22_1: R22.1 U4.B3 | length 62.2
  Top Layer w10: v1(-124.46,-897.4) R22.1@-84.21,-897.4
  Bottom Layer w6: U4.B3@-139.99,-881.87 v1(-124.46,-897.4)
NetR23_1: 
NetR26_1: 
NetR32_1: 
NetR33_1: 
NetR34_1: 
NetR37_1: 
NetR43_1: 
NetR44_1: 
NetR141_1: R141.1 U26.5 U26.6 | length 101.8
  Top Layer w20: U26.6@-602.91,467.8 U26.5@-602.91,430.4 R141.1@-538.5,430.4
NetR142_1: R142.1 U27.5 U27.6 | length 99.8
  Top Layer w20: U27.6@-602.91,616.8 U27.5@-602.91,579.4 R142.1@-540.5,579.4
NetR143_1: R143.1 U28.5 U28.6 | length 37.4
  Top Layer w20: U28.5@-602.91,729.4 U28.6@-602.91,766.8
NetR144_1: R144.1 U29.5 U29.6 | length 112.7
  Bottom Layer w20: R144.1@-776.91,466.78 -702.51,466.78 U29.6@-701.9,467.4 U29.5@-701.9,430
NetR145_1: R145.1 U30.5 U30.6 | length 112.6
  Bottom Layer w20: R145.1@-776.91,616.44 -702.46,616.44 U30.6@-701.9,617.01 U30.5@-701.9,579.61
NetR146_1: R146.1 U31.5 U31.6 | length 112
  Bottom Layer w20: R146.1@-776.91,767.03 U31.6@-702.32,767.03 ; U31.5@-701.9,729.21 U31.6@-701.9,766.61
NetR147_1: R147.1 U32.5 U32.6 | length 105.8
  Top Layer w20: U32.5@-845.91,430 U32.6@-845.91,467.4 R147.1@-777.52,467.4
NetR148_1: R148.1 U33.5 U33.6 | length 105.8
  Top Layer w20: U33.5@-845.91,579.61 U33.6@-845.91,617.01 R148.1@-777.47,617.01
NetR149_1: R149.1 U34.5 U34.6 | length 106.6
  Top Layer w20: U34.5@-845.91,729.21 U34.6@-845.91,766.61 -777.32,766.61 R149.1@-776.91,767.03
NetR150_1: R150.1 U35.5 U35.6 | length 93.6
  Bottom Layer w20: R150.1@-999.73,428.4 -997.73,430.4 U35.5@-944.33,430.4 U35.6@-944.33,467.8
NetR151_1: R151.1 U36.5 U36.6 | length 91.9
  Bottom Layer w20: R151.1@-998.81,579.4 U36.5@-944.33,579.4 U36.6@-944.33,616.8
NetR152_1: R152.1 U37.5 U37.6 | length 93.8
  Bottom Layer w20: R152.1@-999.73,729.4 U37.5@-943.33,729.4 U37.6@-943.33,766.8
NetR164_1: R164.1 U40.5 U40.6 | length 101.8
  Top Layer w20: U40.6@-602.91,-1107 U40.5@-602.91,-1144.4 R164.1@-538.5,-1144.4
NetR165_1: R165.1 U41.5 U41.6 | length 99.8
  Top Layer w20: U41.6@-602.91,-958 U41.5@-602.91,-995.4 R165.1@-540.5,-995.4
NetR166_1: R166.1 U42.5 U42.6 | length 37.4
  Top Layer w20: U42.5@-602.91,-845.4 U42.6@-602.91,-808
NetR167_1: R167.1 U43.5 U43.6 | length 112.7
  Bottom Layer w20: R167.1@-776.91,-1108.02 -702.51,-1108.02 U43.6@-701.9,-1107.4 U43.5@-701.9,-1144.8
NetR168_1: R168.1 U44.5 U44.6 | length 112.6
  Bottom Layer w20: R168.1@-776.91,-958.36 -702.46,-958.36 U44.6@-701.9,-957.8 U44.5@-701.9,-995.2
NetR169_1: R169.1 U45.5 U45.6 | length 112
  Bottom Layer w20: R169.1@-776.91,-807.77 U45.6@-702.32,-807.77 ; U45.5@-701.9,-845.59 U45.6@-701.9,-808.19
NetR170_1: R170.1 U46.5 U46.6 | length 105.8
  Top Layer w20: U46.5@-845.91,-1144.8 U46.6@-845.91,-1107.4 R170.1@-777.52,-1107.4
NetR171_1: R171.1 U47.5 U47.6 | length 105.8
  Top Layer w20: U47.5@-845.91,-995.2 U47.6@-845.91,-957.8 R171.1@-777.47,-957.8
NetR172_1: R172.1 U48.5 U48.6 | length 106.6
  Top Layer w20: U48.5@-845.91,-845.59 U48.6@-845.91,-808.19 -777.32,-808.19 R172.1@-776.91,-807.77
NetR173_1: R173.1 U49.5 U49.6 | length 93.6
  Bottom Layer w20: R173.1@-999.73,-1146.4 -997.73,-1144.4 U49.5@-944.33,-1144.4 U49.6@-944.33,-1107
NetR174_1: R174.1 U50.5 U50.6 | length 91.9
  Bottom Layer w20: R174.1@-998.81,-995.4 U50.5@-944.33,-995.4 U50.6@-944.33,-958
NetR175_1: R175.1 U51.5 U51.6 | length 93.8
  Bottom Layer w20: R175.1@-999.73,-845.4 U51.5@-943.33,-845.4 U51.6@-943.33,-808
NetR187_1: 
NetR188_1: 
NetR189_1: 
NetR190_1: 
NetR191_1: 
NetR192_1: 
NetR193_1: 
NetR194_1: 
NetR195_1: 
NetR196_1: 
NetR197_1: 
NetR198_1: 
NetR210_1: 
NetR211_1: 
NetR212_1: 
NetR213_1: 
NetR214_1: 
NetR215_1: 
NetR216_1: 
NetR217_1: 
NetR218_1: 
NetR219_1: 
NetR220_1: 
NetR221_1: 
OSC_IN: U24.7 U38.7 Y5.3 Y6.3 | length 198.5
  Top Layer w10: Y6.3@-1244.4,-590.81 -1218.99,-590.81 -1187,-622.8 U38.7@-1158.4,-622.8 ; Y5.3@-1244.4,983.99 -1218.99,983.99 -1187,952 U24.7@-1158.4,952
OSC_OUT: U24.8 U38.8 Y5.1 Y6.1 | length 197.7
  Top Layer w10: Y6.1@-1244.4,-685.3 -1221.3,-685.3 -1190.29,-654.29 U38.8@-1158.4,-654.29 ; Y5.1@-1244.4,889.5 -1221.3,889.5 -1190.29,920.51 U24.8@-1158.4,920.51
OTG_ID: R9.1 R20.1 U1.C9 U4.C9 | length 107
  Bottom Layer w6: U4.C9@-171.48,-692.93 -161.93,-692.93 -146.4,-677.4 v1(-124.4,-677.4) ; U1.C9@-171.48,881.87 -161.93,881.87 -146.4,897.4 v1(-124.4,897.4)
OUT1: P12.2 P17.2 U32.1 U33.1 U34.1 U35.1 U36.1 U37.1 U46.1 U47.1 U48.1 U49.1 U50.1 U51.1 | length 3636.7
  Top Layer w20: -1012.8,-957.8 U47.1@-944.33,-957.8 ; -1012.8,617.01 U33.1@-944.33,617.01 ; U46.1@-944.33,-1107.4 -984.4,-1107.4 v2(-1018.4,-1073.4) -1018.4,-834.4 -992.19,-808.19 U48.1@-944.33,-808.19 -913.3,-808.19 v2(-895.4,-790.29) -872.51,-767.4 -736.4,-767.4 -704.4,-735.4 -704.4,-461.4 -800.8,-365.01 P17.2@-800.8,-135.76 ; U32.1@-944.33,467.4 -984.4,467.4 v2(-1018.4,501.4) -1018.4,740.4 -992.19,766.61 U34.1@-944.33,766.61 -913.3,766.61 v2(-895.4,784.51) -872.51,807.4 -736.4,807.4 -704.4,839.4 -704.4,1113.4 -800.8,1209.8 P12.2@-800.8,1439.05
  Bottom Layer w20: v2@-1018.4,-1075.4 -877.51,-1075.4 U49.1@-845.91,-1107 ; v2(-1018.4,-928.4) -875.51,-928.4 U50.1@-845.91,-958 ; v2@-1018.4,499.4 -877.51,499.4 U35.1@-845.91,467.8 ; v2(-1018.4,646.4) -875.51,646.4 U36.1@-845.91,616.8 ; v2(-895.4,-790.29) -877.69,-808 U51.1@-844.91,-808 ; v2(-895.4,784.51) -877.69,766.8 U37.1@-844.91,766.8
OUT2: P12.3 P17.3 U26.1 U27.1 U28.1 U29.1 U30.1 U31.1 U40.1 U41.1 U42.1 U43.1 U44.1 U45.1 | length 3830.1
  Top Layer w20: v2(-964.4,-316.21) -898.21,-316.21 -850.01,-268.01 P17.3@-850.01,-135.76 ; v2(-964.4,1258.59) -898.21,1258.59 -850.01,1306.8 P12.3@-850.01,1439.05 ; U40.1@-701.33,-1107 -671.51,-1077.18 v2(-529.4,-1077.18) ; U41.1@-701.33,-958 -673.73,-930.4 v2(-529.4,-930.4) ; U42.1@-701.33,-808 -668.92,-808 ; U26.1@-701.33,467.8 -671.51,497.62 v2(-529.4,497.62) ; U27.1@-701.33,616.8 -673.73,644.4 v2(-529.4,644.4) ; U28.1@-701.33,766.8 -668.11,766.8 v2(-650.4,784.51)
  Bottom Layer w20: v2@-964.4,-316.4 -964.4,-410.4 -857.4,-517.4 -857.4,-726.86 -810.86,-773.4 -668.48,-773.4 v2(-651.4,-790.48) -633.69,-808.19 U45.1@-603.47,-808.19 -546.16,-808.19 -529.4,-824.95 v2(-529.4,-930.4) -529.4,-1076.4 -560.4,-1107.4 U43.1@-603.47,-1107.4 ; v2@-964.4,1258.4 -964.4,1164.4 -857.4,1057.4 -857.4,847.95 -810.86,801.4 -667.29,801.4 v2(-650.4,784.51) -632.5,766.61 U31.1@-603.47,766.61 -546.16,766.61 -529.4,749.85 v2(-529.4,644.4) -529.4,498.4 -560.4,467.4 U29.1@-603.47,467.4 ; U44.1@-603.47,-957.8 -529.8,-957.8 ; U30.1@-603.47,617.01 -529.8,617.01
PCK_IO: P1.20 P3.20 RS3.5 RS6.5 | length 201.4
  Bottom Layer w10: P3.20@-875.98,-207.62 -875.98,-262.82 -871.4,-267.4 -871.4,-304.67 RS6.5@-870.17,-305.9 ; P1.20@-875.98,1367.19 -875.98,1311.98 -871.4,1307.4 -871.4,1270.13 RS3.5@-870.17,1268.9
RESET: C256.2 C260.2 JP5.1 JP6.1 K5.2 K6.2 R130.2 R153.2 U24.29 U38.29 | length 2280.8
  Top Layer w10: C260.2@-1536.99,-405.4 JP6.1@-1487.4,-405.4 ; C256.2@-1536.99,1169.4 JP5.1@-1487.4,1169.4 ; K6.2@-1148.9,-52.4 -1184.52,-52.4 -1202.4,-70.29 R153.2@-1202.4,-140.4 -1202.4,-266.4 -1179.4,-289.4 -1034.53,-289.4 -1022.4,-289.4 -1005.15,-306.66 U38.29@-1005.15,-375.05 -1005.15,-415.15 v1(-1005.4,-415.4) ; K5.2@-1148.9,1522.4 -1184.52,1522.4 -1202.4,1504.52 R130.2@-1202.4,1434.4 -1202.4,1308.4 -1179.4,1285.4 -1034.53,1285.4 -1022.4,1285.4 -1005.15,1268.15 U24.29@-1005.15,1199.75 -1005.15,1159.66 v1(-1005.4,1159.4)
  Bottom Layer w10: JP6.1@-1487.4,-405.4 -1457.4,-375.4 -1045.4,-375.4 v1(-1005.4,-415.4) ; JP5.1@-1487.4,1169.4 -1457.4,1199.4 -1045.4,1199.4 v1(-1005.4,1159.4)
RX/B: D5.1 D7.1 P11.3 P13.3 P16.3 P18.3 R137.2 R138.2 R160.2 R161.2 U25.7 U39.7 | length 1595.3
  Top Layer w10: v1(-1508.4,-713.58) P16.3@-1375.43,-713.58 ; v1(-1508.4,861.22) P11.3@-1375.43,861.22 ; D7.1@-1379.4,-1141.4 -1301.4,-1141.4 ; D5.1@-1379.4,433.4 -1301.4,433.4 ; R161.2@-1301.4,-1114.4 R160.2@-1301.4,-1167.81 -1147.99,-1167.81 -1137.4,-1178.4 U39.7@-1137.4,-1285.4 ; R138.2@-1301.4,460.4 R137.2@-1301.4,406.99 -1147.99,406.99 -1137.4,396.4 U25.7@-1137.4,289.4
  Bottom Layer w10: v1(-1508.4,-713.58) -1508.4,-822.4 -1469.58,-861.22 P18.3@-1375.43,-861.22 ; v1(-1508.4,861.22) -1508.4,752.4 -1469.58,713.58 P13.3@-1375.43,713.58
RXI: P10.4 P15.4 U24.30 U25.1 U38.30 U39.1 | length 2571.3
  Top Layer w10: v1(-1113.4,-1004.4) -1087.4,-1030.4 U39.1@-1087.4,-1096.43 ; v1(-1113.4,570.4) -1087.4,544.4 U25.1@-1087.4,478.38 ; v1(-1036.64,-318.4) U38.30@-1036.64,-375.05 -1036.64,-456.16 v1(-993.92,-498.88) v1@-990.4,-502.4 ; v1(-1036.64,1256.4) U24.30@-1036.64,1199.75 -1036.64,1118.64 v1(-993.92,1075.92) v1@-990.4,1072.4
  Bottom Layer w10: P15.4@-1337.4,-345.4 -1329.38,-345.4 -1299.7,-315.72 -1039.33,-315.72 v1(-1036.64,-318.4) ; P10.4@-1337.4,1229.4 -1329.38,1229.4 -1299.7,1259.09 -1039.33,1259.09 v1(-1036.64,1256.4) ; v1(-1113.4,-1004.4) -1123.4,-994.4 -1123.4,-797.4 -1107.4,-781.4 -990.19,-781.4 -953.4,-744.61 -953.4,-539.4 v1(-993.92,-498.88) ; v1(-1113.4,570.4) -1123.4,580.4 -1123.4,777.4 -1107.4,793.4 -990.19,793.4 -953.4,830.19 -953.4,1035.4 v1(-993.92,1075.92)
RXVDDQ: C39.2 C40.1 C79.2 C80.1 L3.2 L7.2 U1.A2 U4.A2 | length 461.4
  Top Layer w10: v1(-123.4,-928.26) -138.54,-943.4 L7.2@-180.4,-943.4 -180.4,-989.9 C79.2@-145.9,-1024.4 -145.72,-1024.22 C80.1@-94.9,-1024.22 ; v1(-123.4,646.54) -138.54,631.4 L3.2@-180.4,631.4 -180.4,584.9 C39.2@-145.9,550.4 -145.72,550.58 C40.1@-94.9,550.58
  Bottom Layer w6: v1(-123.4,-928.26) U4.A2@-108.5,-913.36 ; v1(-123.4,646.54) U1.A2@-108.5,661.44
SCK: JP5.5 JP6.5 U24.17 U38.17 | length 1289.7
  Top Layer w10: v1(-884.4,-654.29) U38.17@-820.4,-654.29 ; v1(-884.4,920.51) U24.17@-820.4,920.51
  Bottom Layer w10: JP6.5@-1287.4,-405.4 JP6.5@-1286.4,-406.4 ; JP5.5@-1287.4,1169.4 JP5.5@-1286.4,1168.4 ; JP6.5@-1286.4,-405.4 JP6.5@-1286.4,-406.4 ; JP5.5@-1286.4,1169.4 JP5.5@-1286.4,1168.4 ; v1(-884.4,-654.29) -884.4,-528.4 -974.4,-438.4 -1254.4,-438.4 JP6.5@-1286.4,-406.4 ; v1(-884.4,920.51) -884.4,1046.4 -974.4,1136.4 -1254.4,1136.4 JP5.5@-1286.4,1168.4
SST_N: C28.2 C67.2 U1.A6 U4.A6 | length 42.2
  Bottom Layer w6: U4.A6@-108.5,-787.4 -87.4,-787.4 ; U1.A6@-108.5,787.4 -87.4,787.4
SST_P: C25.2 C63.2 U1.A5 U4.A5 | length 27.2
  Bottom Layer w6: U4.A5@-108.5,-818.89 -94.91,-818.89 ; U1.A5@-108.5,755.91 -94.91,755.91
STB_IO: P1.2 P3.2
TIGG_IO: P1.3 P3.3 R2.1 R13.1 | length 307.9
  Bottom Layer w10: P3.3@-541.34,-207.62 -541.34,-238.46 -532.4,-247.4 -503.19,-247.4 -450.4,-300.19 R13.1@-450.4,-306.81 ; P1.3@-541.34,1367.19 -541.34,1336.34 -532.4,1327.4 -503.19,1327.4 -450.4,1274.61 R2.1@-450.4,1267.99
TX/A: D5.2 D7.2 P11.2 P13.2 P16.2 P18.2 R136.2 R137.1 R159.2 R160.1 U25.6 U39.6 | length 1654.3
  Top Layer w10: v1(-1435.4,-910.4) -1498.4,-910.4 -1530.4,-878.4 -1530.4,-684.4 -1510.37,-664.37 P16.2@-1375.43,-664.37 ; v1(-1435.4,664.4) -1498.4,664.4 -1530.4,696.4 -1530.4,890.4 -1510.37,910.43 P11.2@-1375.43,910.43 ; D7.2@-1379.4,-1221.4 R160.1@-1303.81,-1221.4 ; D5.2@-1379.4,353.4 R137.1@-1303.81,353.4 ; R159.2@-1301.4,-1275.4 R160.1@-1301.4,-1218.99 -1205.81,-1218.99 -1187.4,-1237.4 U39.6@-1187.4,-1285.4 ; R136.2@-1301.4,299.4 R137.1@-1301.4,355.81 -1205.81,355.81 -1187.4,337.4 U25.6@-1187.4,289.4
  Bottom Layer w10: v1(-1435.4,-910.4) P18.2@-1375.43,-910.43 ; v1(-1435.4,664.4) P13.2@-1375.43,664.37
TXO: P10.3 P15.3 U24.31 U25.4 U38.31 U39.4 | length 2724.5
  Top Layer w10: P15.3@-1387.4,-345.4 -1379.38,-345.4 -1349.7,-315.72 -1086.09,-315.72 -1068.14,-333.67 U38.31@-1068.14,-375.05 -1068.14,-468.67 v1@-994.9,-541.9 ; P10.3@-1387.4,1229.4 -1379.38,1229.4 -1349.7,1259.09 -1086.09,1259.09 -1068.14,1241.14 U24.31@-1068.14,1199.75 -1068.14,1106.14 v1@-994.9,1032.9 ; U39.4@-1237.4,-1096.43 -1237.4,-1063.4 -1213.4,-1039.4 -1147.4,-1039.4 v1(-1138.4,-1030.4) ; U25.4@-1237.4,478.38 -1237.4,511.4 -1213.4,535.4 -1147.4,535.4 v1(-1138.4,544.4)
  Bottom Layer w10: v1(-1138.4,-1030.4) -1138.4,-789.4 -1115.4,-766.4 -996.4,-766.4 -968.4,-738.4 -968.4,-566.9 v1(-993.4,-541.9) ; v1(-1138.4,544.4) -1138.4,785.4 -1115.4,808.4 -996.4,808.4 -968.4,836.4 -968.4,1007.9 v1(-993.4,1032.9)
TXVDDQ: C26.2 C27.1 C66.2 C68.1 L4.2 L8.2 U1.B5 U4.B5 | length 637.6
  Top Layer w10: C68.1@-256.9,-1024.22 C66.2@-207.08,-1024.22 ; C27.1@-256.9,550.58 C26.2@-207.08,550.58 ; C66.2@-206.9,-1024.4 -206.9,-910.9 L8.2@-181.4,-885.4 -145.4,-885.4 -127.4,-867.4 -127.4,-866.4 v1(-124.4,-866.4) ; C26.2@-206.9,550.4 -206.9,663.9 L4.2@-181.4,689.4 -145.4,689.4 -127.4,707.4 -127.4,708.4 v1(-124.4,708.4)
  Bottom Layer w6: U4.B5@-139.99,-818.89 -124.4,-834.48 v1(-124.4,-866.4) ; U1.B5@-139.99,755.91 -124.4,740.32 v1(-124.4,708.4)
USB_DS1_DM: U1.A10
USB_DS1_DP: U1.A9
USB_DS1_RXM: U1.A3
USB_DS1_RXP: U1.A4
USB_DS1_TXM: C28.1
USB_DS1_TXP: C25.1
USB_DS2_DM: U4.A10
USB_DS2_DP: U4.A9
USB_DS2_RXM: U4.A4
USB_DS2_RXP: U4.A3
USB_DS2_TXM: C67.1
USB_DS2_TXP: C63.1
USB_DS3_DM: 
USB_DS3_DP: 
USB_DS3_RXM: 
USB_DS3_RXP: 
USB_DS3_TXM: 
USB_DS3_TXP: 
USB_DS4_DM: 
USB_DS4_DP: 
USB_DS4_RXM: 
USB_DS4_RXP: 
USB_DS4_TXM: 
USB_DS4_TXP: 
UTIGGER: P9.1 P14.1 R135.2 R158.2 S5.5 S5.6 S6.5 S6.6 | length 298.8
  Top Layer w10: S6.5@-712.4,-1534.4 S6.6@-662.4,-1534.4 ; S5.5@-712.4,40.4 S5.6@-662.4,40.4 ; R158.2@-556.4,-1524.4 P14.1@-473.4,-1524.4 P14.1@-484.99,-1535.99 ; R135.2@-556.4,50.4 P9.1@-473.4,50.4 P9.1@-484.99,38.81
VCC(+3.3V): C7.2 C15.1 C16.1 C17.1 C18.1 C19.1 C20.1 C29.1 C30.1 C31.1 C32.1 C33.1 C34.1 C35.1 C36.1 C37.1 C47.2 C55.1 C56.1 C57.1 C58.1 C59.1 C60.1 C69.1 C70.1 C71.1 C72.1 C73.1 C74.1 C75.1 C76.1 C77.1 L1.2 L5.2 P1.27 P1.28 P1.29 P1.30 P3.27 P3.28 P3.29 P3.30 R1.2 R3.2 R4.2 R5.1 R6.1 R7.2 R8.2 R12.2 R14.2 R15.2 R16.1 R17.1 R18.2 R19.2 U1.B1 U1.C11 U1.E3 U1.E10 U1.F1 U1.H11 U1.L9 U2.8 U3.8 U4.B1 U4.C11 U4.E3 U4.E10 U4.F1 U4.H11 U4.L9 U5.8 U6.8 | length 1400.9
  Top Layer w10: R15.2@-328.93,-913.36 -321.4,-905.83 -321.4,-811.4 -279.4,-769.4 L5.2@-234.58,-769.4 ; R4.2@-328.93,661.44 -321.4,668.97 -321.4,763.4 -279.4,805.4 L1.2@-234.58,805.4
  Bottom Layer w6: U4.L9@-423.4,-692.93 -407.4,-676.93 -407.4,-646.4 ; U1.L9@-423.4,881.87 -407.4,897.87 -407.4,928.4 ; -407.4,-633.4 -407.4,-646.4 ; -407.4,941.4 -407.4,928.4 ; U4.H11@-328.93,-629.95 -328.93,-605.4 ; U1.H11@-328.93,944.85 -328.93,969.4 ; U4.E10@-234.46,-661.44 -234.46,-654.46 -218.4,-638.4 -218.4,-588.69 -213.4,-583.69 -213.4,-567.12 -225.12,-555.4 -344.4,-555.4 -407.4,-618.4 -407.4,-646.4 ; U1.E10@-234.46,913.36 -234.46,920.34 -218.4,936.4 -218.4,986.12 -213.4,991.12 -213.4,1007.69 -225.12,1019.4 -344.4,1019.4 -407.4,956.4 -407.4,928.4 ; U4.C11@-171.48,-629.95 -171.48,-585.48 ; U1.C11@-171.48,944.85 -171.48,989.32
  other v1: -327.4,-584.4 -327.4,990.4
VCC(+5V): C8.1 C48.1 C258.1 C259.2 C262.1 C263.2 JP5.2 JP6.2 P10.2 P15.2 R130.1 R131.1 R132.1 R133.1 R134.1 R136.1 R140.2 R153.1 R154.1 R155.1 R156.1 R157.1 R159.1 R163.2 U1.E11 U4.E11 U24.4 U24.6 U24.18 U25.8 U38.4 U38.6 U38.18 U39.8 | length 4389.4
  Top Layer w20: JP6.2@-1437.4,-405.4 P15.2@-1437.4,-345.4 -1384.4,-292.4 -1287.82,-292.4 -1253.58,-258.16 R153.1@-1253.58,-140.4 ; JP5.2@-1437.4,1169.4 P10.2@-1437.4,1229.4 -1384.4,1282.4 -1287.82,1282.4 -1253.58,1316.64 R130.1@-1253.58,1434.4 ; R159.1@-1301.4,-1326.58 -1301.4,-1353.4 -1268.4,-1386.4 -1113.4,-1386.4 -1087.4,-1360.4 U39.8@-1087.4,-1285.4 -1028.2,-1285.4 -1026.4,-1283.6 R163.2@-1026.4,-1210.4 ; R136.1@-1301.4,248.22 -1301.4,221.4 -1268.4,188.4 -1113.4,188.4 -1087.4,214.4 U25.8@-1087.4,289.4 -1028.2,289.4 -1026.4,291.2 R140.2@-1026.4,364.4 ; v2(-1228.4,-528.4) -1228.31,-528.31 U38.4@-1158.4,-528.31 -1120.5,-528.31 -1057.51,-591.3 U38.6@-1158.4,-591.3 ; v2(-1228.4,1046.4) -1228.31,1046.5 U24.4@-1158.4,1046.5 -1120.5,1046.5 -1057.51,983.51 U24.6@-1158.4,983.51 ; v3@-1049.4,-591.4 -894.4,-591.4 -863.01,-622.79 U38.18@-820.4,-622.79 ; v3@-1049.4,983.4 -894.4,983.4 -863.01,952.01 U24.18@-820.4,952.01 ; U38.18@-819.97,-623.22 v2(-745.4,-623.22) C262.1@-745.4,-659.4 ; U24.18@-819.97,951.58 v2(-745.4,951.58) C258.1@-745.4,915.4 ; C262.1@-748.4,-662.4 C262.1@-746.4,-660.4 ; C258.1@-748.4,912.4 C258.1@-746.4,914.4
  Bottom Layer w10: v2(-745.4,-623.22) -728.58,-606.4 v1(-617.4,-606.4) ; v2(-745.4,951.58) -728.58,968.4 v1(-617.4,968.4) ; U4.E11@-234.46,-629.95 v1(-234.46,-575.4) ; U1.E11@-234.46,944.85 v1(-234.46,999.4)
  Bottom Layer w15: R155.1@-1144.4,-581.22 R156.1@-1088.4,-581.22 -1059.48,-581.22 v3(-1049.4,-591.3) ; R132.1@-1144.4,993.58 R133.1@-1088.4,993.58 -1059.48,993.58 v3(-1049.4,983.51) ; v3@-1039.92,-581.81 R157.1@-1012.4,-581.81 -1028.22,-565.99 R154.1@-1028.22,-531.4 ; v3@-1039.92,992.99 R134.1@-1012.4,992.99 -1028.22,1008.81 R131.1@-1028.22,1043.4
  Bottom Layer w20: JP6.2@-1437.4,-405.4 -1437.4,-465.4 -1374.4,-528.4 v2(-1228.4,-528.4) ; JP5.2@-1437.4,1169.4 -1437.4,1109.4 -1374.4,1046.4 v2(-1228.4,1046.4)
VCC_9V: P11.8 P12.1 P13.8 P16.8 P17.1 P18.8 U26.2 U27.2 U28.2 U29.2 U30.2 U31.2 U32.2 U33.2 U34.2 U35.2 U36.2 U37.2 U40.2 U41.2 U42.2 U43.2 U44.2 U45.2 U46.2 U47.2 U48.2 U49.2 U50.2 U51.2 | length 3672
  Top Layer w20: U46.2@-944.33,-1144.8 -911.8,-1144.8 v2(-894.4,-1127.4) v2(-894.4,-976.4) ; U47.2@-944.33,-995.2 -913.2,-995.2 v2(-894.4,-976.4) ; U48.2@-944.33,-845.59 -915.21,-845.59 v2(-894.4,-866.4) v2(-894.4,-976.4) ; U32.2@-944.33,430 -911.8,430 v2(-894.4,447.4) v2(-894.4,598.4) ; U33.2@-944.33,579.61 -913.2,579.61 v2(-894.4,598.4) ; U34.2@-944.33,729.21 -915.21,729.21 v2(-894.4,708.4) v2(-894.4,598.4) ; U40.2@-701.33,-1144.4 -667.4,-1144.4 v2(-651.4,-1128.4) ; U41.2@-701.33,-995.4 v2(-652.4,-995.4) ; U42.2@-701.33,-845.4 -668.4,-845.4 v2(-651.4,-862.4) ; U26.2@-701.33,430.4 -667.4,430.4 v2(-651.4,446.4) ; U27.2@-701.33,579.4 v2(-652.4,579.4) ; U28.2@-701.33,729.4 -668.4,729.4 v2(-651.4,712.4)
  Top Layer w25: v4(-1459.65,-959.65) P16.8@-1375.43,-959.65 ; v4(-1459.65,615.16) P11.8@-1375.43,615.16
  Bottom Layer w20: v2(-894.4,-1127.4) -877.4,-1144.4 U49.2@-845.91,-1144.4 ; v2(-894.4,-976.4) -875.4,-995.4 U50.2@-845.91,-995.4 ; v2(-894.4,-866.4) -873.4,-845.4 U51.2@-844.91,-845.4 ; v2(-894.4,447.4) -877.4,430.4 U35.2@-845.91,430.4 ; v2(-894.4,598.4) -875.4,579.4 U36.2@-845.91,579.4 ; v2(-894.4,708.4) -873.4,729.4 U37.2@-844.91,729.4 ; v2@-651.2,-995.2 U44.2@-603.47,-995.2 ; v2@-651.2,579.61 U30.2@-603.47,579.61 ; U43.2@-603.47,-1144.8 -635,-1144.8 v2(-651.4,-1128.4) v2(-651.4,-862.4) -634.59,-845.59 U45.2@-603.47,-845.59 ; U29.2@-603.47,430 -635,430 v2(-651.4,446.4) v2(-651.4,712.4) -634.59,729.21 U31.2@-603.47,729.21
  Bottom Layer w25: v4(-1459.65,-959.65) -1524.16,-959.65 -1541.4,-942.4 -1541.4,-650.4 -1506.16,-615.16 P18.8@-1375.43,-615.16 ; v4(-1459.65,615.16) -1524.16,615.16 -1541.4,632.4 -1541.4,924.4 -1506.16,959.65 P13.8@-1375.43,959.65
VDD(+1.2V): C9.1 C10.1 C11.1 C12.1 C21.1 C22.1 C23.1 C24.1 C38.2 C49.1 C50.1 C51.1 C52.1 C61.1 C62.1 C64.1 C65.1 C78.2 L2.1 L3.1 L4.1 L6.1 L7.1 L8.1 U1.B10 U1.C3 U1.E9 U1.F11 U1.H1 U1.J11 U1.L5 U1.L7 U4.B10 U4.C3 U4.E9 U4.F11 U4.H1 U4.J11 U4.L5 U4.L7 | length 1737.7
  Bottom Layer w6: U4.L5@-423.4,-818.89 -407.89,-818.89 -407.4,-818.4 ; U4.L7@-423.4,-755.91 -407.4,-771.91 -407.4,-818.4 ; U1.L5@-423.4,755.91 -407.89,755.91 -407.4,756.4 ; U1.L7@-423.4,818.89 -407.4,802.89 -407.4,756.4 ; U4.J11@-360.42,-631.42 U4.J11@-360.42,-629.95 -360.42,-598.98 -345.85,-584.4 -262.4,-584.4 -249.4,-597.4 -249.4,-630.4 ; U1.J11@-360.42,943.38 U1.J11@-360.42,944.85 -360.42,975.83 -345.85,990.4 -262.4,990.4 -249.4,977.4 -249.4,944.4 ; U4.H1@-328.93,-944.85 -328.93,-930.4 ; U1.H1@-328.93,629.95 -328.93,644.4 ; U4.F11@-265.95,-629.95 -249.85,-629.95 -249.4,-630.4 ; U1.F11@-265.95,944.85 -249.85,944.85 -249.4,944.4 ; U4.C3@-171.48,-881.87 -184.41,-894.8 -184.41,-921.73 -193.08,-930.4 -328.93,-930.4 ; U1.C3@-171.48,692.93 -184.41,680.01 -184.41,653.07 -193.08,644.4 -328.93,644.4 ; U4.B10@-139.99,-661.44 -150.44,-661.44 -167.4,-678.4 -184.4,-678.4 -190.05,-684.05 -190.05,-698.29 -197.62,-705.86 -221.54,-705.86 U4.E9@-234.46,-692.93 -249.4,-677.99 -249.4,-630.4 ; U1.B10@-139.99,913.36 -150.44,913.36 -167.4,896.4 -184.4,896.4 -190.05,890.76 -190.05,876.52 -197.62,868.95 -221.54,868.95 U1.E9@-234.46,881.87 -249.4,896.81 -249.4,944.4 ; -407.4,-818.4 -407.4,-825.4 -398.4,-834.4 -381.4,-834.4 -375.4,-840.4 -375.4,-920.4 -365.4,-930.4 -328.93,-930.4 ; -407.4,756.4 -407.4,749.4 -398.4,740.4 -381.4,740.4 -375.4,734.4 -375.4,654.4 -365.4,644.4 -328.93,644.4
XCK_IO: P1.19 P3.19
XTAL_IN: C2.2 C42.2 U1.C6 U4.C6 Y1.1 Y2.1 | length 1270.2
  Top Layer w6: C42.2@-311.4,-1247.22 -311.4,-984.96 -281.4,-954.96 v1(-281.42,-834.42) ; C2.2@-311.4,327.58 -311.4,589.85 -281.4,619.85 v1(-281.42,740.38)
  Top Layer w10: Y2.1@-373.09,-1246.91 -372.78,-1247.22 C42.2@-313.4,-1247.22 ; Y1.1@-373.09,327.9 -372.78,327.58 C2.2@-313.4,327.58 ; C42.2@-313.72,-1246.91 C42.2@-313.4,-1247.22 ; C2.2@-313.72,327.9 C2.2@-313.4,327.58 ; C42.2@-311.4,-1249.22 C42.2@-313.4,-1247.22 ; C42.2@-311.4,-1247.22 C42.2@-313.4,-1247.22 ; C2.2@-311.4,325.58 C2.2@-313.4,327.58 ; C2.2@-311.4,327.58 C2.2@-313.4,327.58
  Bottom Layer w6: v1(-281.42,-834.42) -192.4,-834.4 -184.41,-826.41 -184.41,-800.33 U4.C6@-171.48,-787.4 ; v1(-281.42,740.38) -192.4,740.4 -184.41,748.4 -184.41,774.48 U1.C6@-171.48,787.4
XTAL_OUT: C1.2 C41.2 U1.C7 U4.C7 Y1.2 Y2.2 | length 1647.5
  Top Layer w6: Y2.2@-459.71,-1309.9 -414.4,-1264.59 -414.4,-1234.4 -396.4,-1216.4 -335.4,-1216.4 -322.9,-1203.9 -322.9,-980.9 -302.4,-960.4 -302.4,-824.4 v1(-281.43,-803.37) v1(-281.43,-803.37) ; Y1.2@-459.71,264.91 -414.4,310.21 -414.4,340.4 -396.4,358.4 -335.4,358.4 -322.9,370.9 -322.9,593.9 -302.4,614.4 -302.4,750.4 v1(-281.43,771.43) v1(-281.43,771.43)
  Top Layer w10: C41.2@-520.4,-1309.58 -460.02,-1309.58 Y2.2@-459.71,-1309.9 Y2.2@-459.4,-1310.2 ; C1.2@-520.4,265.22 -460.02,265.22 Y1.2@-459.71,264.91 Y1.2@-459.4,264.6
  Bottom Layer w6: v1(-281.43,-803.37) -224.4,-803.4 -217.4,-796.4 -217.4,-775.4 -210.58,-768.58 -208.58,-768.58 -208.33,-768.84 -184.41,-768.84 -177.19,-761.62 ; v1(-281.43,771.43) -224.4,771.4 -217.4,778.4 -217.4,799.4 -210.58,806.22 -208.58,806.22 -208.33,805.97 -184.41,805.97 -177.19,813.19 ; -180.19,-764.62 -177.19,-761.62 ; -180.19,810.19 -177.19,813.19 ; U4.C7@-171.48,-755.91 -177.19,-761.62 ; U1.C7@-171.48,818.89 -177.19,813.19